# Altium PCB WlPK1.PcbDoc
Units mm, origin at the board's own origin, x right, y up, seen from the top; angles counter-clockwise.
Board outline 110 x 174 mm, 2 copper layers (Top Layer, Bottom Layer), stack 1.621 mm thick; 22 components, 15 nets, 70 pads, 0 vias.
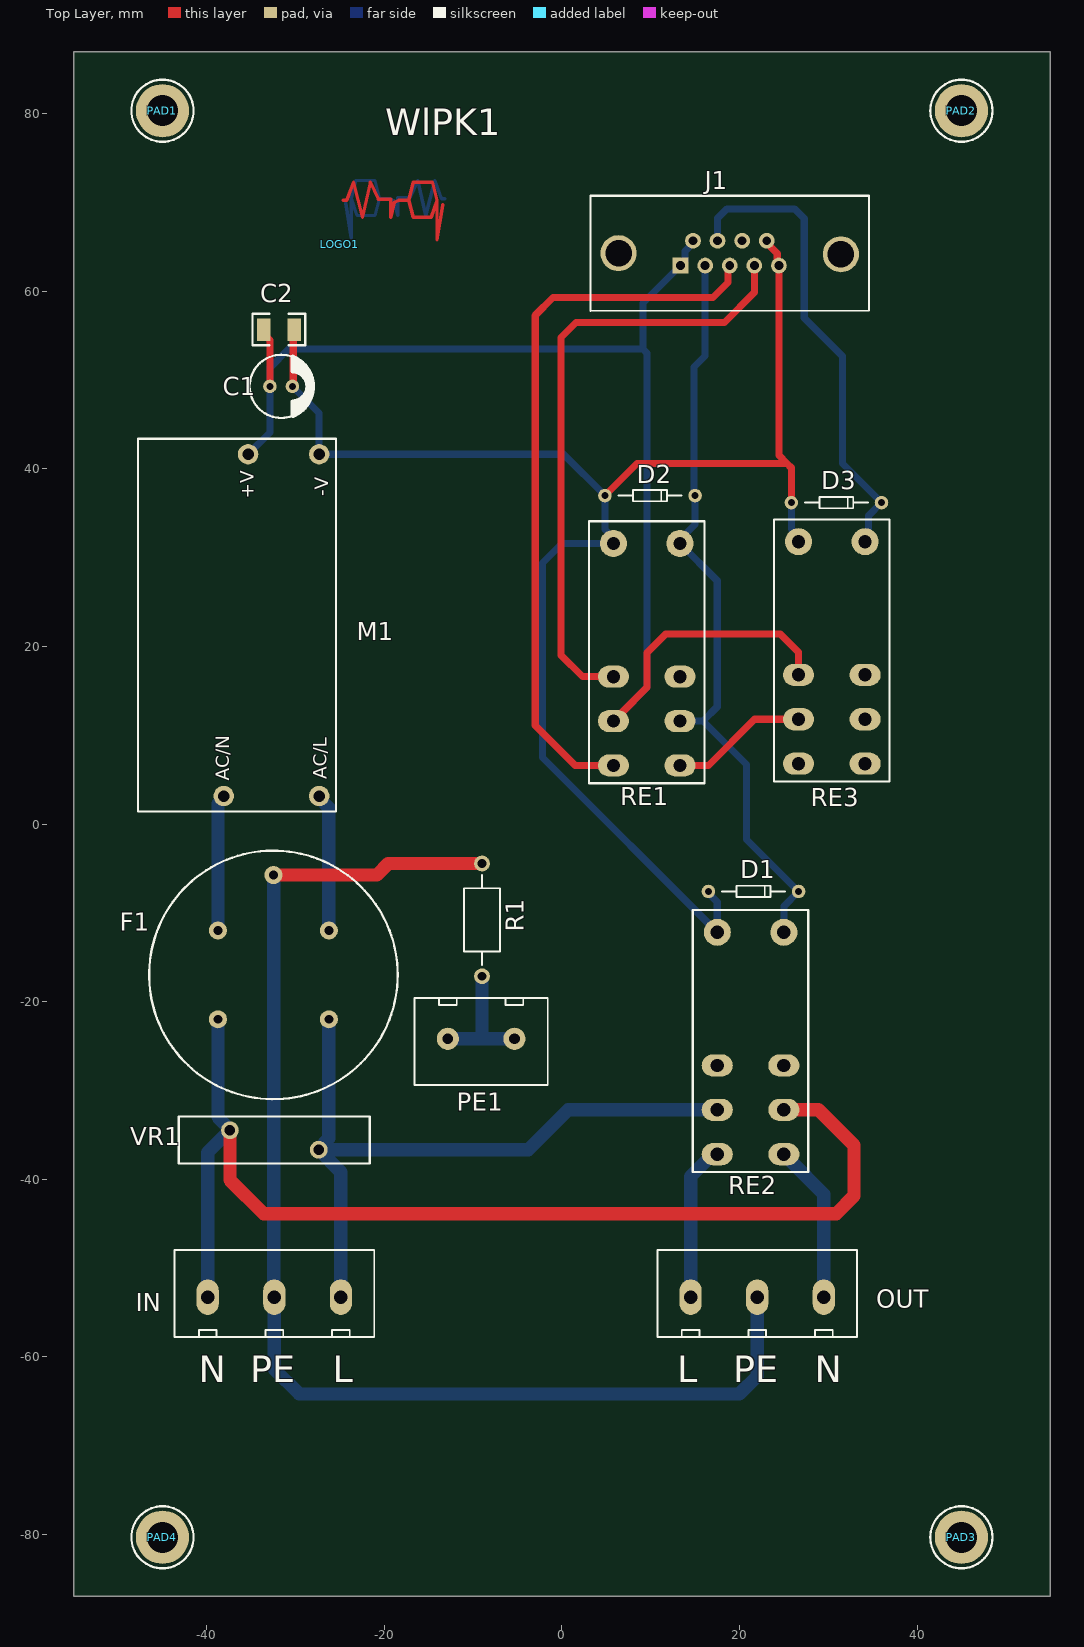
[diagram p0: Top Layer view]
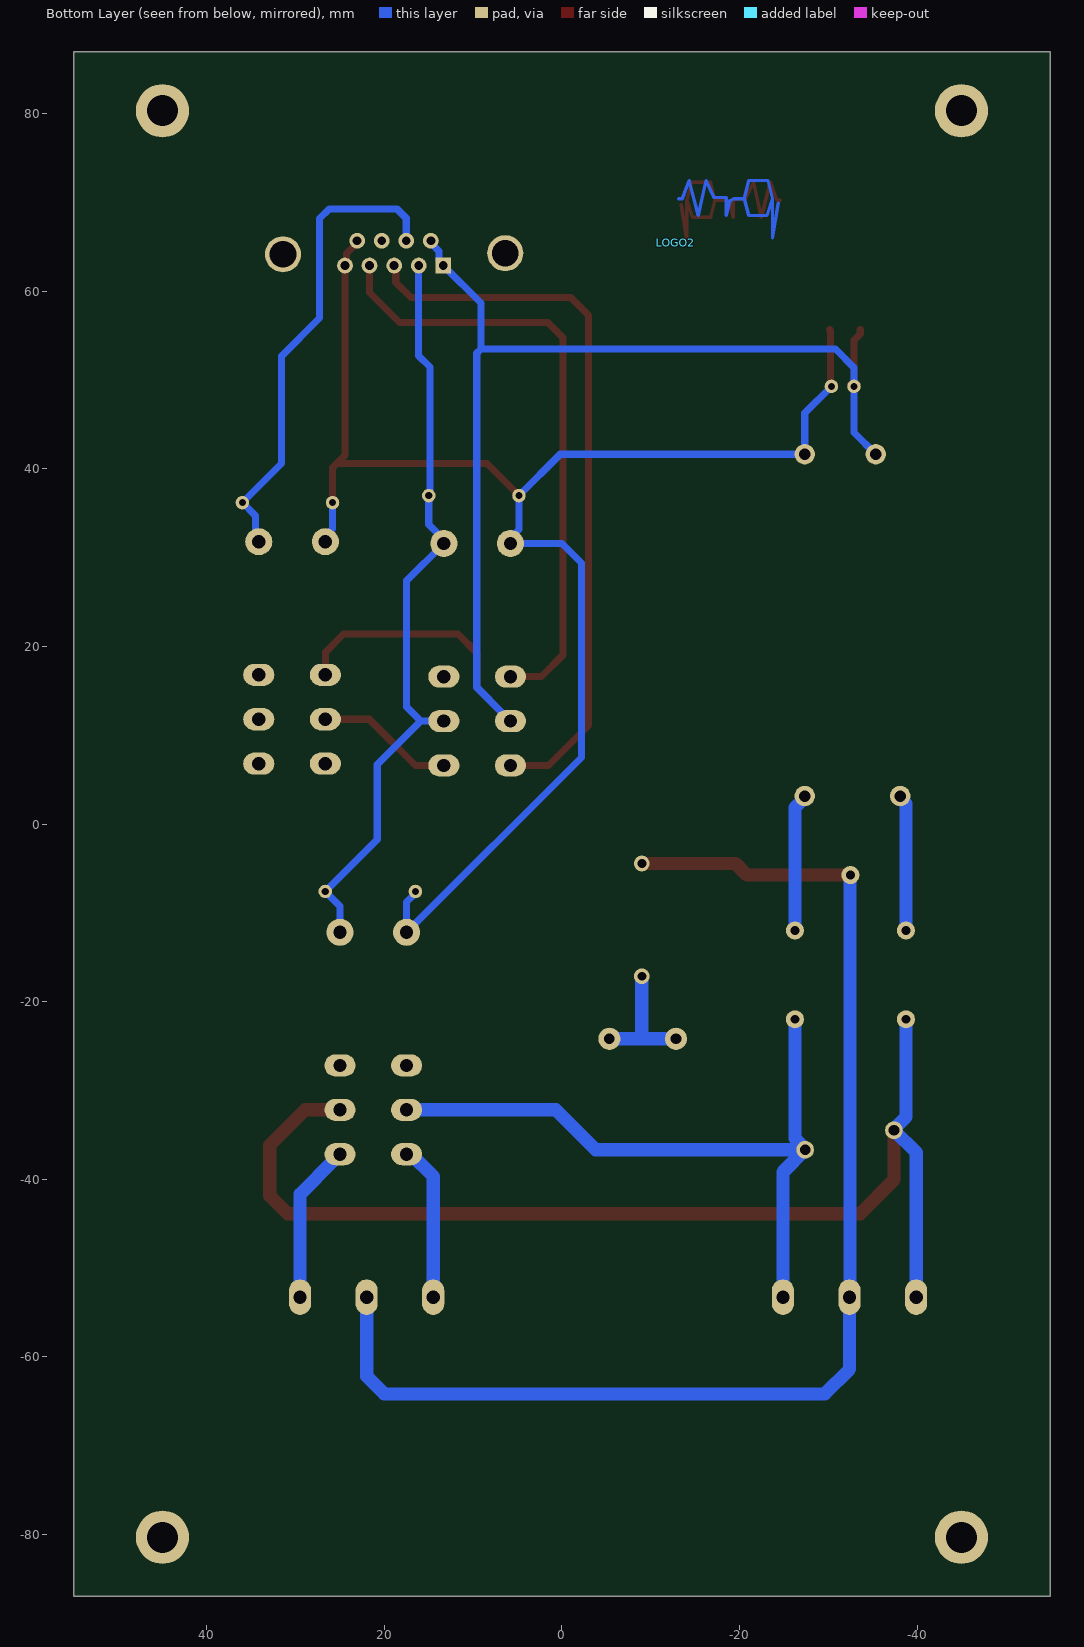
[diagram p1: Bottom Layer view, seen from below]

## Layer stack, top to bottom
Top Solder: solder mask 0.0102, Solder Resist, Dk 3.5
Top Layer: signal copper 0.0356
Dielectric1: dielectric 1.55, FR-4, Dk 4.8
Bottom Layer: signal copper 0.0356
Bottom Solder: solder mask 0.0102, Solder Resist, Dk 3.5

## Board outline
-55,-87 -55,87 55,87 55,-87

## Design rules (kind name [scope] priority, off if disabled: settings)
BoardOutlineClearance [All] p1: gap=0.5 ignorepadtopadclearanceinfootprint=FALSE
Clearance 230VACL [InNet('230VACL')] p1: gap=2.5 ignorepadtopadclearanceinfootprint=FALSE
Clearance 230VACLF [InNet('230VACLF')] p2: gap=2.5 ignorepadtopadclearanceinfootprint=FALSE
Clearance 230VACN [InNet('230VACN')] p3: gap=2.5 ignorepadtopadclearanceinfootprint=FALSE
Clearance 230VACNF [InNet('230VACNF')] p4: gap=2.5 ignorepadtopadclearanceinfootprint=FALSE
Clearance InPolyClearance [InPoly] p5: gap=0.3 ignorepadtopadclearanceinfootprint=FALSE except(0: Arc-Hole Track-Hole SMDPad-Hole THPad-Hole Via-Hole Fill-Hole Poly-Hole Region-Hole Text-Hole)
Clearance ClearanceMidLayer [OnMid] p6: gap=0.152 ignorepadtopadclearanceinfootprint=FALSE except(0: Arc-Hole Track-Hole SMDPad-Hole THPad-Hole Via-Hole Fill-Hole Poly-Hole Region-Hole Text-Hole)
Clearance ClearanceOuterLayer [OnBottomLayer or OnTopLayer] p7: gap=0.152 ignorepadtopadclearanceinfootprint=FALSE
ComponentClearance [All] p1 off: gap=0.254 collisioncheckmode=3 verticalgap=0.254 showdistances=FALSE
Height [All] p1: minheight=0 maxheight=40 prefheight=12.7
HoleSize [All] p1: absolutevalues=TRUE maxlimit=6 minlimit=0.025 maxpercent=80.000 minpercent=20.000
MinimumAnnularRing MinimumAnnularRingOuterLayer [OnTopLayer or OnBottomLayer] p1: minimumring=0.152
MinimumAnnularRing MinimumAnnularRingOnMid [OnMid] p2: minimumring=0.127
MinimumSolderMaskSliver [not(IsComponentPrimitive and OnSolderMask)] p1 off: minsoldermaskwidth=0.1
MinimumSolderMaskSliver SilkscreenOverComponentPads [All] p2: minsoldermaskwidth=0.1
NetAntennae [All] p1: netantennaetolerance=0.3
PolygonConnect PolygonConnectDirect [IsVia] p1: connectstyle=Direct reliefconductorwidth=0.254 reliefentries=4 polygonreliefangle="90 Angle" airgapwidth=0.254
PolygonConnect PolygonConnectElse [All] p2: connectstyle=Relief reliefconductorwidth=0.25 reliefentries=4 polygonreliefangle="90 Angle" airgapwidth=0.25
RoutingVias [All] p1: holewidth=0.6 width=1.1 viastyle="Through Hole" minholewidth=0.3 minwidth=0.5 maxholewidth=2 maxwidth=4
SilkToSilkClearance [All] p1: silktosilkclearance=0.1
SilkToSolderMaskClearance SilkToSolderMaskClearanceVia [IsVia] p1: minsilkscreentomaskgap=0.1 clearancetoexposedcopper=TRUE
SilkToSolderMaskClearance SilkToSolderMaskClearancePad [IsPad] p2: minsilkscreentomaskgap=0.1 clearancetoexposedcopper=TRUE
SolderMaskExpansion [All] p1: expansion=0.1 istentingtop=FALSE
Width [All] p1: maxlimit=4 minlimit=0.102 preferedwidth=0.18 minimp=50.000000 maximp=50.000000 favimp=50.000000 checkconnectedcopper=TRUE
23 further rules are at their usual default settings.

## Components (designator, comment, footprint, x,y, rotation, side; value= is the part's Value field where it differs from the comment)
C1 "100u/35" CE1028 -31.63,49.3 r0 top
C2 "4u7/50" 1210 -33.6,55.7 r0 top
D1 "1N4148" CE02 26.66,-7.6 r180 top
D2 "1N4148" CE02 15,37 r180 top
D3 "1N4148" CE02 36,36.2 r180 top
F1 "1FM414-1R" 1FM414 -32.5,-17 r90 top
IN "DG300-7.5-3P11" DG300-7.5-3P11 -32.4,-53.3 r180 top
J1 "DF09PP" DB9/F 18.903,64.303 r0 top
LOGO1 "MRQ_5" MRQ_5_TL -25,65.3 r0 top
LOGO2 "MRQ_5" MRQ_5_TL -12.8,65.5 r180 bottom
M1 "MFM-10-24" MFM-10-24 -36.6,21.4 r90 top
OUT "DG300-7.5-3P11" DG300-7.5-3P11 22,-53.3 r180 top
PAD1 "PAD3_5MM" PAD3_5MM -45,80.35 r0 top locked
PAD2 "PAD3_5MM" PAD3_5MM 45,80.35 r0 top locked
PAD3 "PAD3_5MM" PAD3_5MM 45,-80.35 r0 top locked
PAD4 "PAD3_5MM" PAD3_5MM -45,-80.35 r0 top locked
PE1 "DG300-7.5-2P11" DG300-7.5-2P11 -9.1,-24.2 r0 top
R1 "1M 0.5W" R502816 -9,-10.8 r270 top
RE1 "RM84-2012-35-1024" RM84-P 9.55,31.6 r0 top
RE2 "RM84-2012-35-1024" RM84-P 21.25,-12.2 r0 top
RE3 "RM84-2012-35-1024" RM84-P 30.4,31.8 r0 top
VR1 "SIOV-S20K250" SIOV-S20K275 -32.4,-35.6 r180 top

## Footprints (in the part's own frame and the unit in brackets; to place one, negate y for a bottom-side part, rotate by r counter-clockwise, add the part's x,y. Pads: shape width x height; smd on the part's side, far side on the other; paste and mask are expansions set on the pad)
1FM414 [mm]
  round 2.032 hole 1: 1(-5,-6.25) 2(-5,6.25) 3(5,-6.25) 4(5,6.25) 5(11.25,0)
  silkscreen extent -14,-14 14,14
1210 [mil]
  rect 60x100 smd: 1(0,0) 2(135,0)
  silkscreen extent -50,-70 185,70, body extent 5,-49 130,49, height 75
CE02 [mil]
  round 60 hole 31.5: ANOD(400,0) CATH(0,0)
  silkscreen extent 60,-25 340,25, body extent -12,-51 412,51, height 98
CE1028 [mil]
  round 60 hole 31.5: 1(50,0) 2(-50,0)
  silkscreen extent -140,-140 140,140, body extent -138,-138 137,138, height 591
DB9/F [mil]
  round 160 hole 118.11: 0(-493,0) 0(493,-5)
  rect 70x70 hole 39.37: 1(-218,-55)
  round 70 hole 39.37: 2(-109,-55) 3(0,-55) 4(109,-55) 5(218,-55) 6(-163,55) 7(-54,55) 8(55,55) 9(164,55)
  silkscreen extent -618,-255 618,255, body extent -606,-247 606,247, height 518
DG300-7.5-2P11 [mm]
  round 2.5 hole 1.2: 1(-3.75,0) 2(3.75,0)
  silkscreen extent -7.5,-5.2 7.5,4.6, body extent -7.47,-5.2 8.27,4.6, height 13.8
DG300-7.5-3P11 [mm]
  oval 2.5x4 hole 1.5: 1(-7.5,0) 2(0,0) 3(7.5,0)
  silkscreen extent -11.25,-5.3 11.25,4.5, body extent -11.22,-5.2 12.02,4.6, height 13.8
MFM-10-24 [mm]
  round 2.3 hole 1.3: 1(-18.25,-9.25) 2(-18.25,1.5) 3(20.25,-9.25) 4(20.25,-1.25)
  silkscreen extent -20,-11.15 22,11.15, body extent -20,-11.15 22,11.15, height 20.5
MRQ_5_TL [mm]
  Top Layer lines w0.381: 0.381,4.953 0.762,4.953 1.524,6.985 2.54,3.048 3.429,6.985 4.318,5.08 5.715,5.08 5.715,3.048 6.096,4.699 6.604,4.953 7.747,4.953 ; 11.557,4.445 10.922,0.508 10.922,4.953 ; 7.747,4.953 8.255,3.048 10.287,3.048 10.922,4.953 ; 7.747,4.953 8.255,6.985 10.414,6.985 10.922,4.953
PAD3_5MM [mm]
  round 6 hole 3.5: 1(0,0)
  silkscreen extent -3.5,-3.5 3.5,3.5
R502816 [mil]
  round 70 hole 39.37: 1(-250,0) 2(250,0)
  silkscreen extent -200,-80 200,80
RM84-P [mm]
  round 3.048 hole 1.5: 1(-3.75,0) 2(3.75,0)
  oval 3.5x2.5 hole 1.5: 3(3.75,-15) 4(3.75,-20) 5(3.75,-25) 6(-3.75,-15) 7(-3.75,-20) 8(-3.75,-25)
  silkscreen extent -6.5,-27 6.5,2.5, body extent -6.35,-26.75 6.35,2.25, height 15.7
SIOV-S20K275 [mm]
  round 2 hole 1.2: 1(-5,1.1) 2(5,-1.1)
  silkscreen extent -10.75,-2.65 10.75,2.65, body extent -10.75,-2.65 10.67,2.65, height 25.48

## Part data
C1: library part CAP15, Manufacturer5=SAMHA, DateOfPrice5=2010-01-01, Descript="Kondensator: elektrolityczny; THT; 100uF; 35VDC; Ø6,3x11mm; ±20%", ID=15, Identyfikator=15, PartIdx=CAP15, Price5=0, Reference5=SD1V107M6L011BB, Supplier5=tme.pl, Typ5=SD1V107M6L011BB
C2: library part CAP99, Manufacturer5=Samsung, DateOfPrice5=2010-01-01, Descript="Kondensator: ceramiczny; 4,7uF; 50V; X7R; ±10%; SMD; 1210; -55÷125°C", ID=99, Identyfikator=99, PartIdx=CAP99, Price5=2, Reference5=CL32B475KBUYNNE, Supplier5=tme.pl, Typ5=CL32B475KBUYNNE
D1 D2 D3: library part DIO2, Manufacturer5=Vishay, DateOfPrice5=2010-01-01, Descript="Dioda: przełączająca; 100V; 300mA; 2A; DO35", ID=2, Identyfikator=2, PartIdx=DIO2, Price5=0, Reference5=1N4148-TAP, Supplier5=tme.pl, Typ5=1N4148-TAP
F1: library part Ind14, Manufacturer5=FilterCon, DateOfPrice5=2010-01-01, Descript="Radio filter 250VAC, 1A", ID=14, Identyfikator=14, PartIdx=Ind14, Price5=15, Reference5=1FM414-1R, Supplier5=tme.pl
IN OUT: library part Con33, Manufacturer5=Degson, DateOfPrice5=2010-01-01, Descript="Listwa zaciskowa; kątowe 90°; 2,5mm2; 7,5mm; tory:3; cynowany; 24A", ID=33, Identyfikator=33, PartIdx=Con33, Price5=1, Reference5=DG300-7.5-3P11, Replacement="maritex: TB7503S", Supplier5=tme.pl, Typ5=DG300-7.5-03P-11-00A(H)
J1: library part Con312, Manufacturer5=Connfly, DateOfPrice5=01-01-2010, Descript="Gniazdo; D-Sub; PIN:9; żeńskie; proste; THT; złocony", ID=312, Kod=Con312, Price5=1, Reference5=DF09PP, Replacement=bd, Supplier5=tme.pl, Typ5=DS1034-09FUNSISS
LOGO1 LOGO2: library part Oth88, Manufacturer5=bd, DateOfPrice5=01-01-2010, Descript=bd, ID=88, Kod=Oth88, Price5=-1, Reference5=bd, Supplier5=bd, Typ5=bd
M1: library part Mod92, Manufacturer5=MeanWell, DateOfPrice5=2010-01-01, Descript="Zasilacz: impulsowy; 10W; 80÷264VAC; Wyjścia: 1; 420mA; -30÷85°C", ID=92, Identyfikator=92, PartIdx=Mod92, Price5=33, Reference5=MFM-10-24, Supplier5=tme.pl, Typ5=MFM-10-24
PAD1 PAD2 PAD3 PAD4: library part Oth106, Manufacturer5=bd, DateOfPrice5=2010-01-01, Descript=bd, ID=106, Identyfikator=106, PartIdx=Oth106, Price5=-1, Reference5=bd, Supplier5=bd, Typ5=bd
PE1: library part Con32, Manufacturer5=Degson, DateOfPrice5=01-01-2010, Descript="Listwa zaciskowa; kątowe 90°; 2,5mm2; 7,5mm; tory:2; cynowany; 24A", ID=32, Kod=Con32, Price5=0, Reference5=DG300-7.5-2P11, Replacement="maritex: TB7502S", Supplier5=tme.pl, Typ5=DG300-7.5-02P-11-00A(H)
R1: library part Res69, Manufacturer5="brak danych", DateOfPrice5=2010-01-01, Descript="Resistor 1 megaohm, 0.5W, 5%", ID=69, Identyfikator=69, PartIdx=Res69, Price5=0, Reference5=1/2W-1M, Supplier5=tme.pl, Typ5="brak danych"
RE1 RE2 RE3: library part Rel14, Manufacturer5=Relpol, DateOfPrice5=2010-01-01, Descript="Przekaźnik: elektromagnetyczny; DPDT; Ucewki : 24VDC; 8A/250VAC", ID=14, Identyfikator=14, PartIdx=Rel14, Price5=5, Reference5=RM84-2012-35-1024, Supplier5=tme.pl, Typ5=RM84-2012-35-1024
VR1: library part Vre35, Manufacturer5=Epcos, DateOfPrice5=2020-06-03, Descript="Warystor: metalowo-tlenkowy; THT; 250VAC; 320VDC; 390V; 8000A; 140J", ID=35, Identyfikator=35, PartIdx=Vre35, Price5=2,6, Reference5=SIOV-S20K250, Supplier5=tme.pl, Typ5=S20K250

## Nets (pads, with @x,y where several pads share a name; then routed paths per layer and width w, separated by ;. In a path a pad name is that pad's centre, name@x,y a point inside that pad or via, vN(x,y) a via of type N, cw(c..) or ccw(c..) an arc to the next point about the centre after c; other vN are vias at no path point)
230VACL: F1.1 IN.1 RE2.7 VR1.1 | length 79.6
  Bottom Layer w1.5: F1.1 -26.25,-35.415 -27.4,-36.565 VR1.1 ; IN.1 -24.9,-39.2 VR1.1 ; RE2.7 0.7,-32.2 -3.8,-36.7 VR1.1
230VACLF: F1.3 M1.1 | length 15.8
  Bottom Layer w1.5: M1.1@-27.3,3.4 -27.3,2.884 -26.25,1.834 F1.3
230VACN: F1.2 IN.3 RE2.4 VR1.2 | length 126.5
  Top Layer w1.5: VR1.2 -37.4,-40.1 -33.6,-43.9 30.9,-43.9 32.9,-41.9 32.9,-36.2 28.9,-32.2 RE2.4
  Bottom Layer w1.5: IN.3 -39.9,-37 VR1.2 -37.4,-34.365 -38.75,-33.015 F1.2
230VACNF: F1.4 M1.2 | length 15.4
  Bottom Layer w1.5: F1.4 -38.75,2.284 -38,3.034 M1.2@-38,3.1
+24V: C1.2 C2.1 J1.1 J1.6 M1.4 RE1.7 RE3.6 | length 150.4
  Top Layer w0.8: C2.1 -33.6,55.192 -32.9,54.492 C1.2 ; RE1.7 5.84,11.6 6.625,12.385 6.625,12.425 9.6,15.4 9.6,19.3 11.7,21.4 24.6,21.4 26.65,19.35 RE3.6
  Bottom Layer w0.8: M1.4 -32.9,44.1 C1.2 -32.9,51.4 -30.8,53.5 9.131,53.5 ; RE1.7 5.84,11.6 6.625,12.385 6.625,12.425 9.6,15.4 9.6,53.031 9.131,53.5 ; J1.6 14.763,65.435 13.855,64.527 13.855,63.395 J1.1 9.131,58.672 9.131,53.5 ; RE3.6 26.69,16.8 27.475,17.585 RE3.6@27.475,17.625
GND: C1.1 C2.2 D1.ANOD D2.ANOD D3.ANOD J1.5 J1.9 M1.3 RE1.1 RE2.1 RE3.1 | length 176.4
  Top Layer w0.8: C1.1 -30.265,49.395 -30.265,55.605 C2.2 ; D2.ANOD 8.44,40.6 25.371,40.6 ; J1.9 23.069,65.435 24.253,64.251 24.253,63.093 J1.5 24.44,41.531 25.371,40.6 ; D3.ANOD 25.84,40.131 25.371,40.6
  Bottom Layer w0.8: C1.1 -27.35,46.29 M1.3 0.19,41.65 D2.ANOD 4.84,33.168 5.8,32.208 RE1.1 0,31.6 -2.2,29.4 -2.2,7.5 RE2.1 17.5,-8.796 16.5,-7.796 D1.ANOD ; D3.ANOD 25.84,33.218 26.65,32.408 RE3.1
GREENLAMP: J1.4 RE1.6 | length 70.6
  Top Layer w0.8: RE1.6 2.3,16.6 -0.1,19 -0.1,54.8 1.6,56.5 18.3,56.5 21.672,59.872 J1.4
  Bottom Layer w0.8: RE1.6@4.84,16.6 RE1.6
NetOUT_1: OUT.1 RE2.5 | length 18.1
  Bottom Layer w1.5: RE2.5 25.229,-37.2 25.691,-37.662 25.691,-37.891 29.5,-41.7 OUT.1
NetOUT_3: OUT.3 RE2.8 | length 17.6
  Bottom Layer w1.5: OUT.3 14.5,-39.7 17,-37.2 RE2.8
NetPE1_1: PE1.1 PE1.2 R1.2 | length 14.6
  Bottom Layer w1.5: PE1.1 -8.8,-24.2 ; R1.2 -9,-24 -8.8,-24.2 ; PE1.2 -8.8,-24.2
NetRE1_5: RE1.5 RE3.7 | length 15.5
  Top Layer w0.8: RE1.5 16.5,6.6 21.7,11.8 RE3.7
OFF: D3.CATH J1.7 RE3.2 | length 54
  Bottom Layer w0.8: J1.7 17.531,68.231 18.6,69.3 26.2,69.3 27.3,68.2 27.3,57 31.6,52.7 31.6,40.6 D3.CATH 34.52,34.72 34.52,32.17 RE3.2
ON: D1.CATH D2.CATH J1.2 RE1.2 RE1.4 RE2.2 | length 86.5
  Bottom Layer w0.8: RE1.4 15.9,11.6 ; J1.2 16.134,52.734 14.865,51.465 14.865,37.135 D2.CATH 15,33.752 13.3,32.052 RE1.2 17.5,27.4 17.5,13.2 15.9,11.6 ; RE2.2 25,-9.26 D1.CATH 20.8,-1.74 20.8,6.7 15.9,11.6
PE: F1.5 IN.2 OUT.2 R1.1 | length 145.1
  Top Layer w1.5: F1.5 -20.85,-5.75 -19.55,-4.45 R1.1
  Bottom Layer w1.5: IN.2@-32.7,-53.3 -32.45,-53.05 -32.45,-5.8 F1.5 ; IN.2 -32.4,-61.4 -29.6,-64.2 20,-64.2 22,-62.2 OUT.2
REDLAMP: J1.3 RE1.8 | length 82.1
  Top Layer w0.8: RE1.8 1.5,6.6 -3,11.1 -3,57.3 -1,59.3 17,59.3 18.716,61.016 18.716,62.719 J1.3
  Bottom Layer w0.8: RE1.8@5.78,6.58 RE1.8
pads on no net: J1.0 J1.8 PAD1.1 PAD2.1 PAD3.1 PAD4.1 RE1.3 RE2.3 RE2.6 RE3.3 RE3.4 RE3.5 RE3.8

## Silkscreen, mask and mechanical layers (free items; w line width, h text height)
Top Overlay:
  text "WlPK1" at -19.9,77.6 h3
  text "N" at -40.9,-62.9 h3
  text "PE" at -35.1,-62.9 h3
  text "L" at -25.8,-62.9 h3
  text "L" at 13,-62.9 h3
  text "PE" at 19.3,-62.9 h3
  text "N" at 28.5,-62.9 h3
Obrys:
  the board outline again, w0.254

## Dimensions
45,-80.35 to 45,80.35 on Dims
-45,-80.35 to 45,-80.35 on Dims
55,-87 to 55,87 on Dims
-55,-87 to 55,-87 on Dims

## Text inside footprints (layer, text, board x,y; h text height)
M1: Top Overlay "+V" at -34.7,36.65 h1.52 r90; Top Overlay "-V" at -26.35,36.9 h1.52 r90; Top Overlay "AC/N" at -37.45,4.85 h1.52 r90; Top Overlay "AC/L" at -26.5,5.05 h1.52 r90